# EAGLE board myLiPo_v24 (EAGLE 5.11)
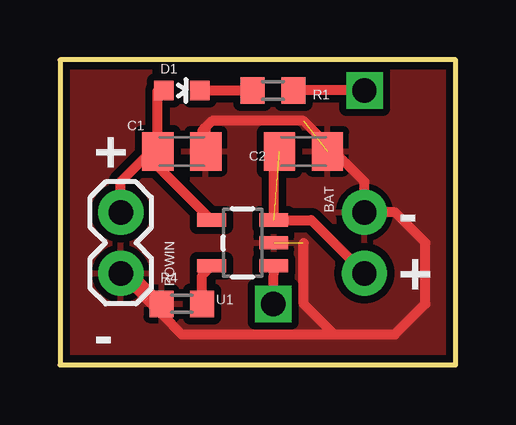
[diagram p0: board, top side]
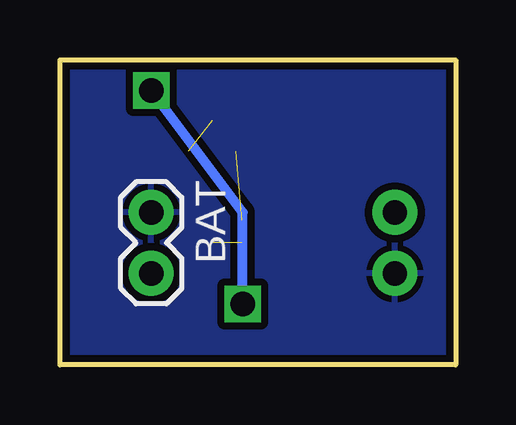
[diagram p1: board, bottom side, seen from below]

Size 16.51 x 12.7 mm. Coordinates in mm from the lower left corner, seen from the top.
Outline: 16.51,0 16.51,12.7 0,12.7 0,0 16.51,0
Copper layers (1*16): Top 0.035mm / dielectric 1.5mm / Bottom 0.035mm
Design rules "SparkFun": minimum track width 8mil, minimum drill 20mil, track to track 8mil, track to pad 8mil, pad to pad 8mil, via to via 8mil, smd to smd 8mil, copper to edge 10mil, drill to drill 8mil, minimum pad ring 12mil, minimum via ring 10mil, stop-mask expansion 4mil, vias tented up to drill 25mil, thermal gap 10mil

## Footprints (pad centres in the part's own frame; a part is rotated, then mirrored left to right if it is on the bottom)
1X02 = drill 1.016 pad 1.88 round: 1 0,0; 2 2.54,0
C0805K = smd 1.3 x 1.6: 1 -1,0; 2 1,0
LED-0603 = smd 0.8 x 0.8: A 0,-0.75; C 0,0.75
R0603 = smd 1 x 1.1: 1 -0.85,0; 2 0.85,0
SOT23-5 = smd 0.55 x 1.2: 1 -0.95,-1.3; 2 0,-1.3; 3 0.95,-1.3; 4 0.95,1.3; 5 -0.95,1.3

## Placement (x,y rotation side)
BAT  [1X02]  12.7,6.35 270 bottom
C1  4.7 uF  [C0805K]  5.08,8.89 0 top
C2  4.7 uF  [C0805K]  10.16,8.89 0 top
D1  RED  [LED-0603]  5.08,11.43 270 top
POWIN  [1X02]  2.54,6.35 270 top
R1  330  [R0603]  8.89,11.43 0 top
R4  10k  [R0603]  5.08,2.54 0 top
U1  MCP73831  [SOT23-5]  7.62,5.08 90 top
U$1  CREATIVE_COMMONS  [CREATIVE_COMMONS]  -31.75,-10.16 0 top  (outside the outline)

## Library data of the parts
BAT D1 POWIN U1 U$1 = SparkFun
C1 C2 R1 R4 = resistor

## Nets
GND: BAT.1 C1.2 C2.2 POWIN.2 R4.1 U1.2
N$3: D1.C R1.1
PROG: R4.2 U1.5
STAT: R1.2 U1.1
VCC: BAT.2 C2.1 U1.3
VIN: C1.1 D1.A POWIN.1 U1.4

## Tracks (layer width: path | path; a pad name or v marks a point on that pad's centre or on a via)
GND  (2 unrouted)
  Top 0.406: 11.43,1.27 5.08,1.27 4.23,2.12 R4.1 2.96,3.81 POWIN.2 3.81,2.54 | 11.43,1.27 13.97,1.27 15.24,2.54 15.24,5.08 13.97,6.35 BAT.1 12.7,7.62 10.16,10.16 6.35,10.16 6.08,9.89 | 6.08,9.89 5.93,9.74 | 10.16,5.08 10.16,2.54 11.43,1.27 | 6.08,9.89 C1.2
  pour Bottom (isolate 0.305): 0,0 0,12.7 16.51,12.7 16.51,0
  pour Top (isolate 0.305): 0,12.7 16.51,12.7 16.51,0 0,0
N$3
  Top 0.406: D1.C R1.1
PROG
  Top 0.406: R4.2 5.93,3.74 U1.5
STAT  (via drill 1.02)
  Top 0.406: v8.89,2.54 U1.1 | v12.7,11.43 R1.2
  Bottom 0.406: v8.89,2.54 8.89,6.35 v12.7,11.43
VCC  (1 unrouted)
  Top 0.406: 8.92,8.5 U1.3 10.48,6.03 BAT.2
VIN
  Top 0.406: POWIN.1 2.54,7.62 3.81,8.89 C1.1 | C1.1 4.08,11.28 | C1.1 4.08,8.27 U1.4 | D1.A 4.08,11.43 C1.1

## Text on the board
tPlace: + | BAT | - | + | -